# Altium PCB Shield_PCB.PcbDoc
Units mm, origin at the board's own origin, x right, y up, seen from the top; angles counter-clockwise.
Board outline 57.15 x 53.34 mm, 2 copper layers (Top Layer, Bottom Layer), stack 1.031 mm thick; 34 components, 67 nets, 124 pads, 10 vias.
Unrouted connection lines stored in the file: 1.
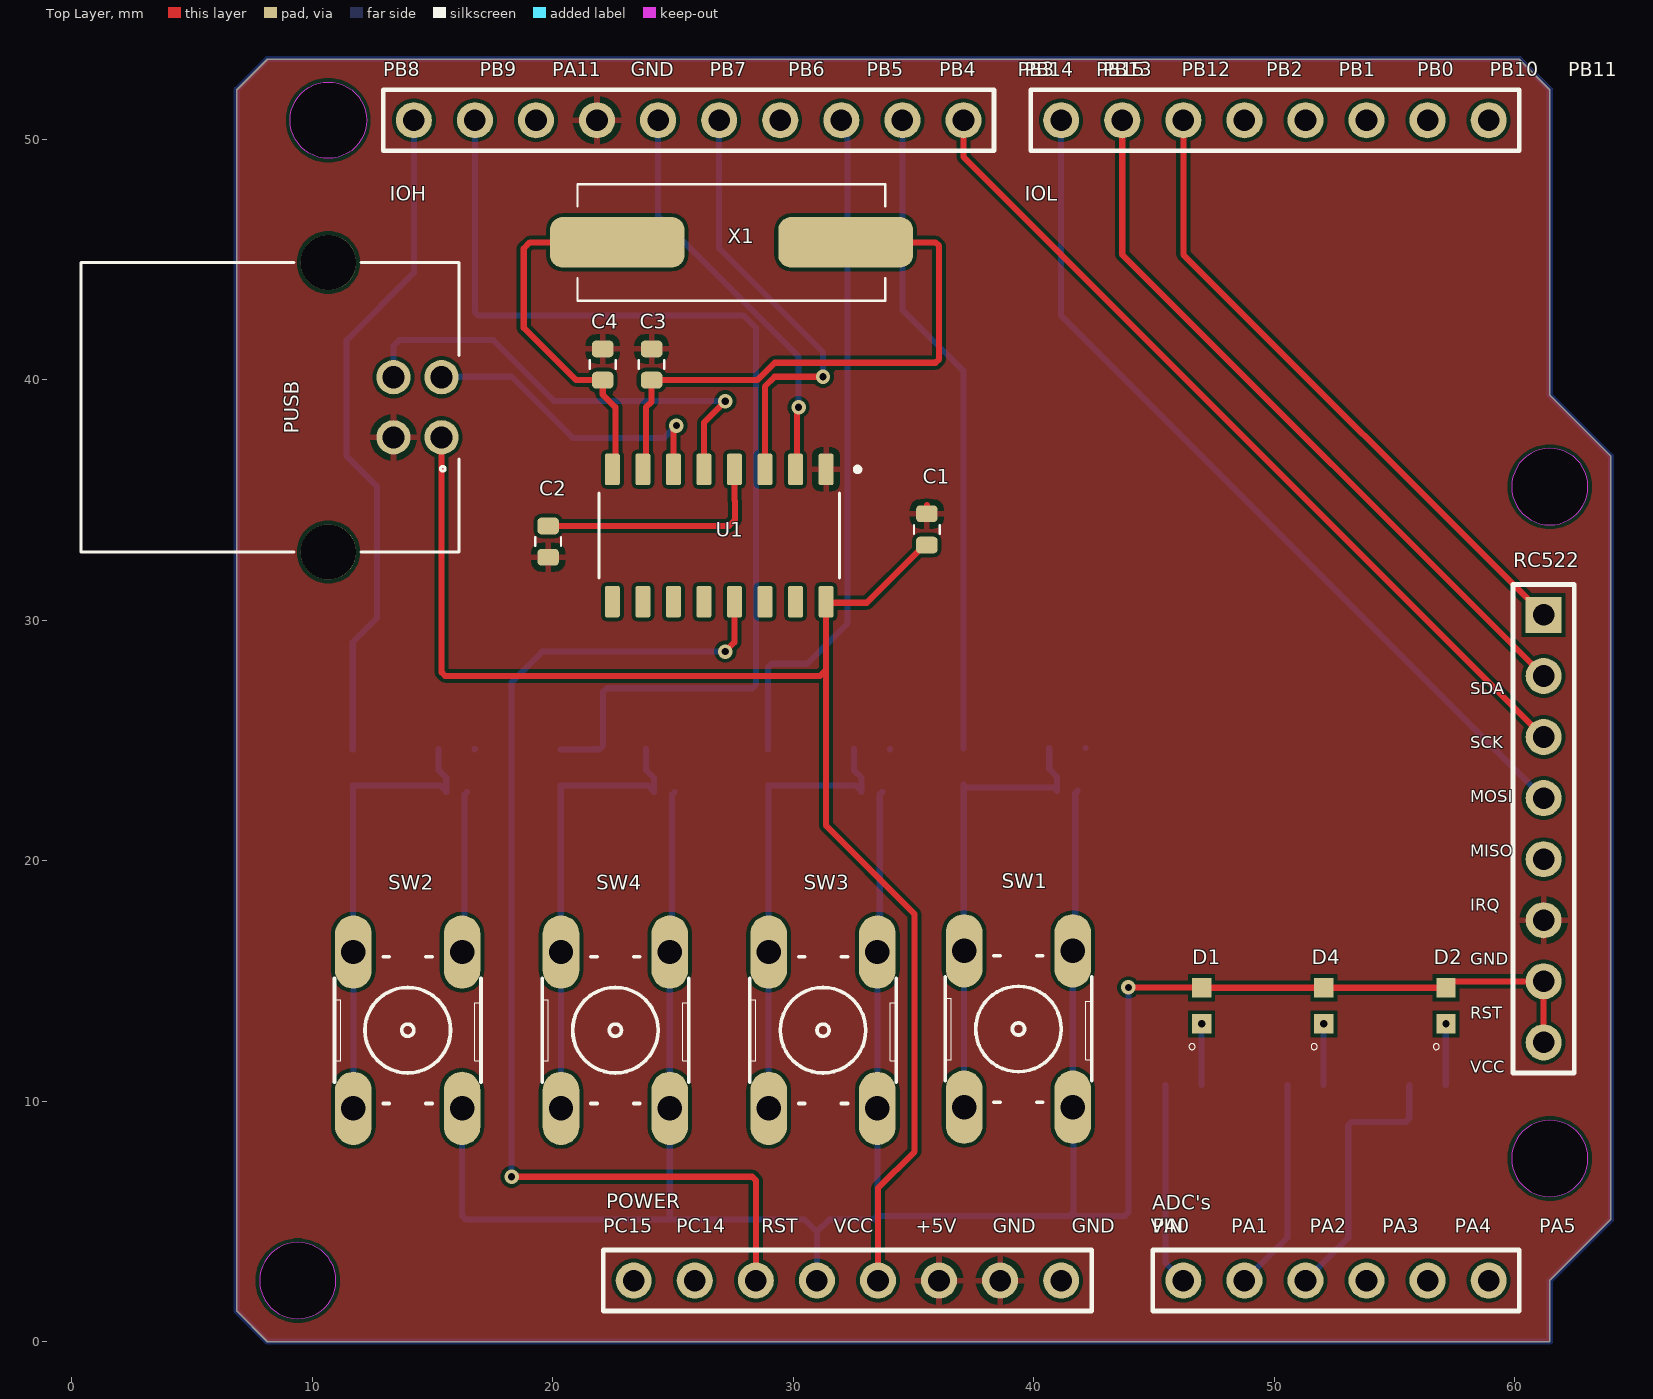
[diagram p0: Top Layer view]
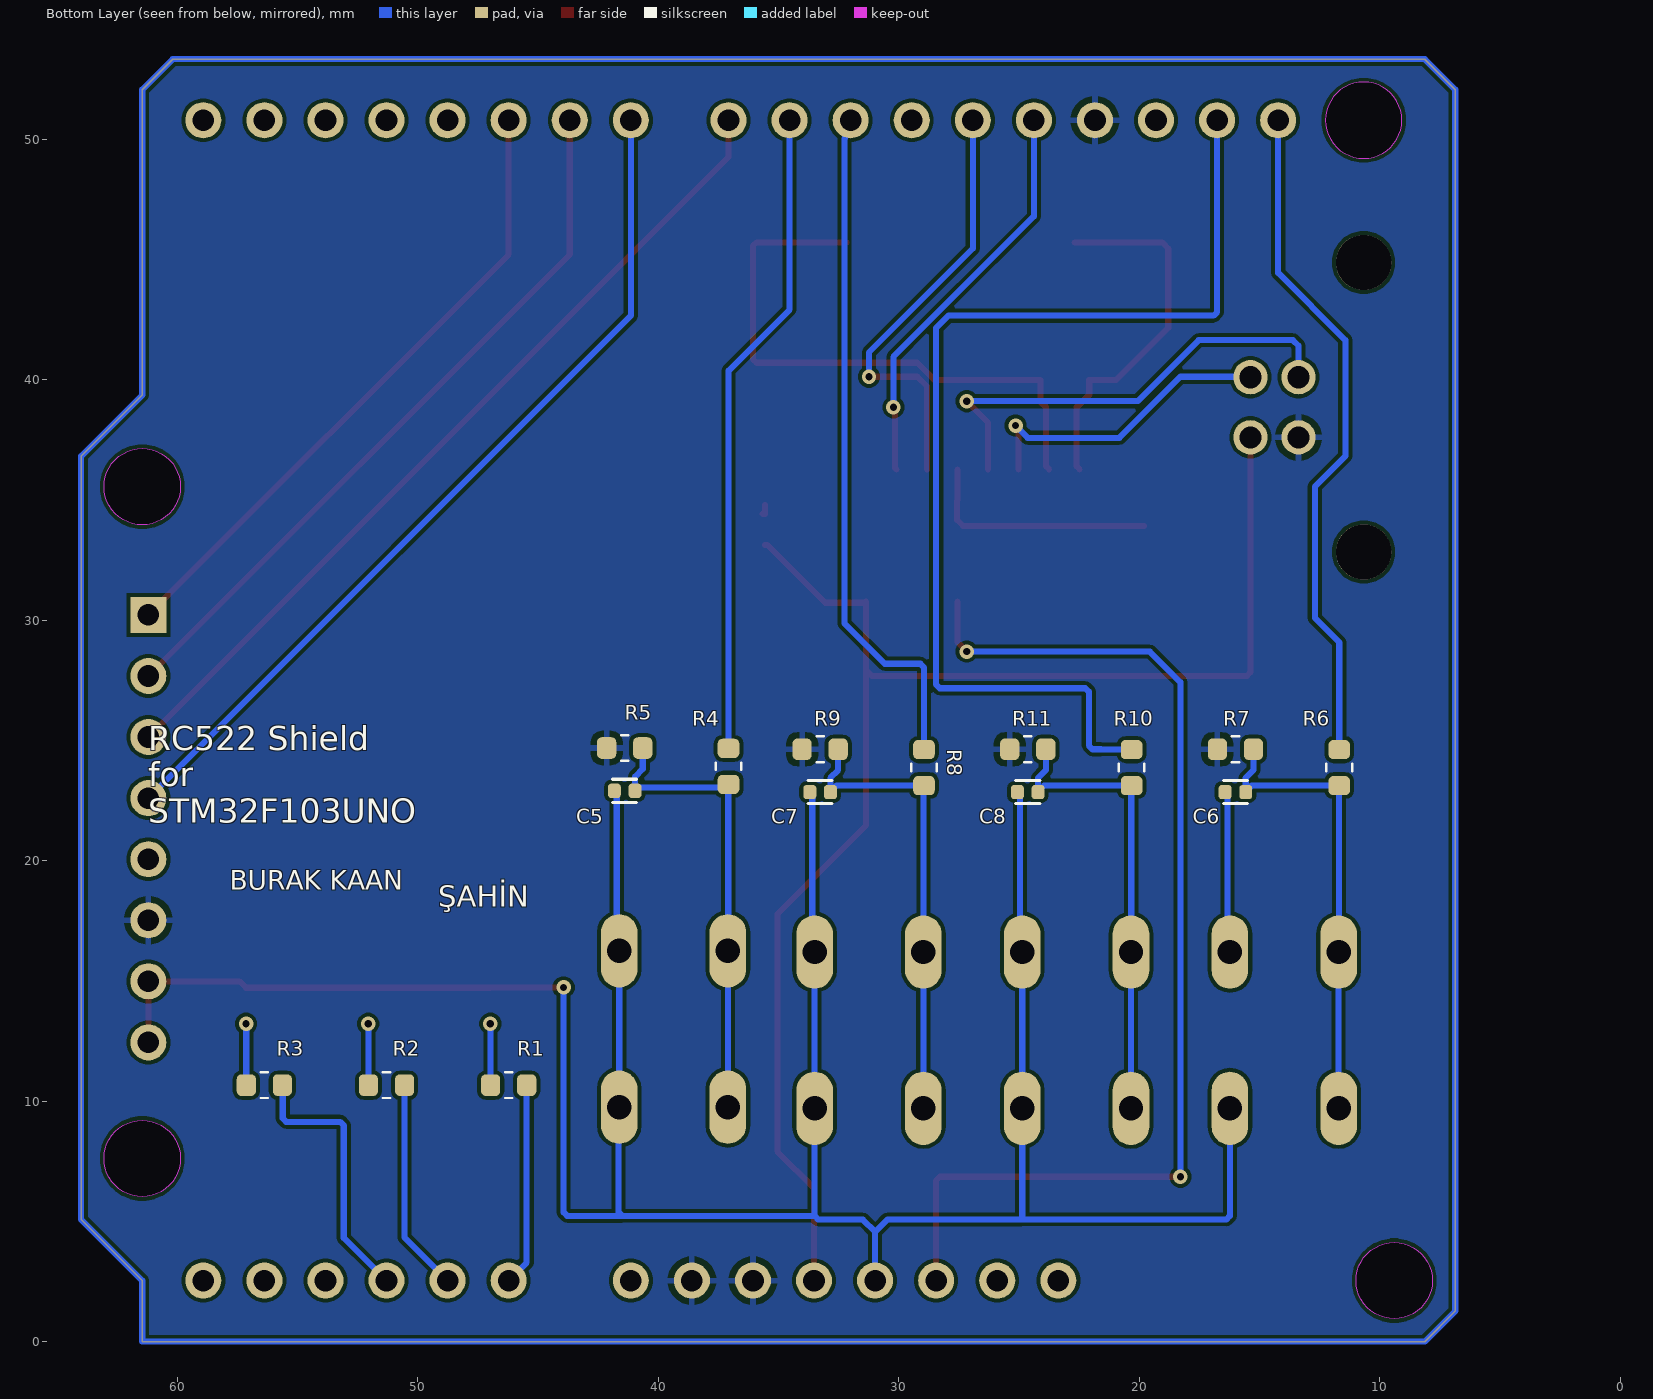
[diagram p1: Bottom Layer view, seen from below]
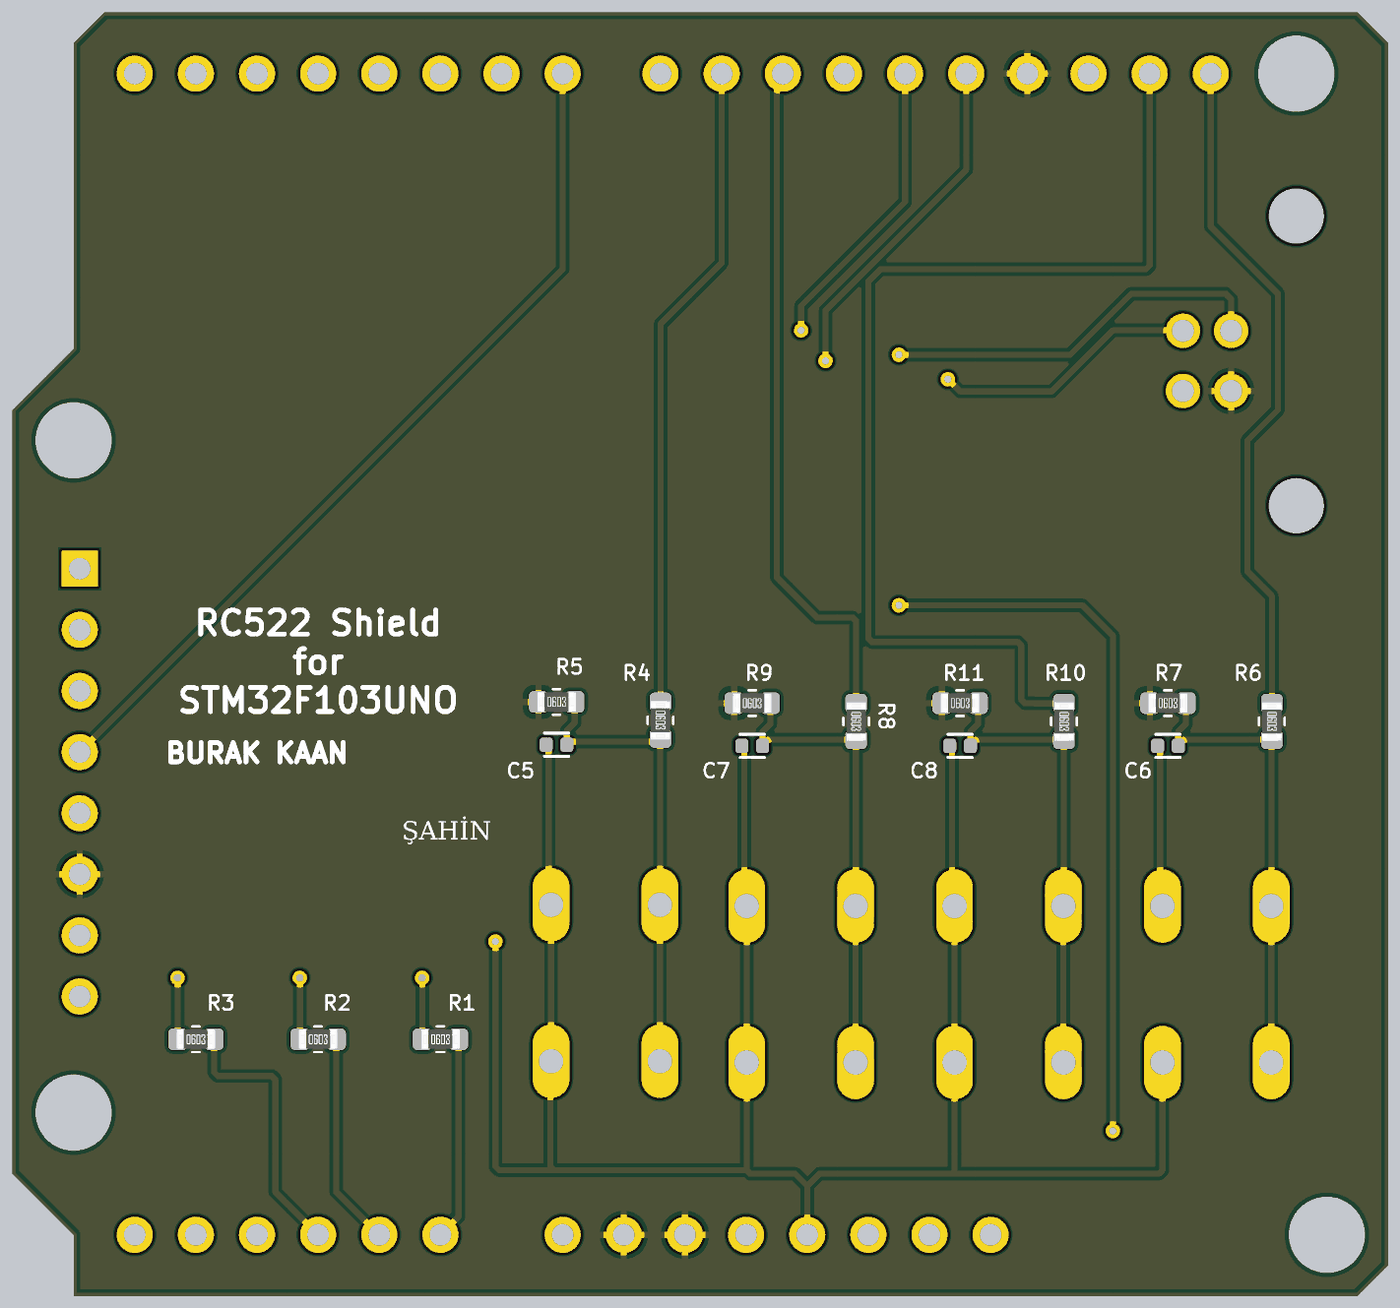
[diagram p2: 3D render of the assembled board from below, using the file's embedded part models]

## Layer stack, top to bottom
Top Solder: solder mask 0.0102, Solder Resist, Dk 3.5
Top Layer: signal copper 0.0356
Dielectric 1: dielectric 0.32, FR-4, Dk 4.8
Dielectric2: dielectric 0.32, FR-4, Dk 4.8
Dielectric3: dielectric 0.32, FR-4, Dk 4.8
Bottom Layer: signal copper 0.0356
Bottom Solder: solder mask 0.0102, Solder Resist, Dk 3.5

## Board outline
8.128,0 61.468,0 61.468,2.54 64.008,5.08 64.008,36.83 61.468,39.37 61.468,52.07 60.198,53.34 8.128,53.34 6.858,52.07 6.858,27.432 6.858,1.27
cut-out: 7.81,2.54 ccw(c9.398,2.54) 9.398,0.953 ccw(c9.398,2.54) 10.986,2.54 ccw(c9.398,2.54) 9.398,4.127 ccw(c9.398,2.54)
cut-out: 10.668,49.212 cw(c10.668,50.8) 9.08,50.8 cw(c10.668,50.8) 10.668,52.387 cw(c10.668,50.8) 12.255,50.8 cw(c10.668,50.8)
cut-out: 59.88,35.56 ccw(c61.468,35.56) 61.468,33.972 ccw(c61.468,35.56) 63.055,35.56 ccw(c61.468,35.56) 61.468,37.148 ccw(c61.468,35.56)
cut-out: 59.88,7.62 ccw(c61.468,7.62) 61.468,6.032 ccw(c61.468,7.62) 63.055,7.62 ccw(c61.468,7.62) 61.468,9.207 ccw(c61.468,7.62)

## Design rules (kind name [scope] priority, off if disabled: settings)
Clearance [All] p1: gap=0.152 ignorepadtopadclearanceinfootprint=FALSE except(0: Arc-Hole Track-Hole SMDPad-Hole THPad-Hole Via-Hole Fill-Hole Poly-Hole Region-Hole Text-Hole)
DiffPairsRouting [All] p1: maxlimit=0.254 minlimit=0.254 mostfreqgap=0.254 toplayer_minwidth=0.381 toplayer_maxwidth=0.381 toplayer_prefwidth=0.381 bottomlayer_minwidth=0.381 bottomlayer_maxwidth=0.381 bottomlayer_prefwidth=0.381 substack1={5EA368DA-DBC4-4814-93F0-2F85ABCD8383} toplayer_{5ea368da-dbc4-4814-93f0-2f85abcd8383}_minwidth=0.381 toplayer_{5ea368da-dbc4-4814-93f0-2f85abcd8383}_maxwidth=0.381 toplayer_{5ea368da-dbc4-4814-93f0-2f85abcd8383}_prefwidth=0.381 bottomlayer_{5ea368da-dbc4-4814-93f0-2f85abcd8383}_minwidth=0.381 bottomlayer_{5ea368da-dbc4-4814-93f0-2f85abcd8383}_maxwidth=0.381 bottomlayer_{5ea368da-dbc4-4814-93f0-2f85abcd8383}_prefwidth=0.381 maxuncoupledlength=12.7
PolygonConnect [All] p1: connectstyle=Relief reliefconductorwidth=0.254 reliefentries=4 polygonreliefangle="90 Angle" airgapwidth=0.254
RoutingVias [All] p1: holewidth=0.3 width=0.6 viastyle="Through Hole" minholewidth=0.3 minwidth=0.4 maxholewidth=1.2 maxwidth=1.2
SolderMaskExpansion [All] p1: expansion=0.102 istentingtop=FALSE
Width [All] p1: maxlimit=0.508 minlimit=0.152 preferedwidth=0.254 substack1={5EA368DA-DBC4-4814-93F0-2F85ABCD8383} toplayer_{5ea368da-dbc4-4814-93f0-2f85abcd8383}_minwidth=0.254 toplayer_{5ea368da-dbc4-4814-93f0-2f85abcd8383}_maxwidth=0.254 bottomlayer_{5ea368da-dbc4-4814-93f0-2f85abcd8383}_minwidth=0.254 bottomlayer_{5ea368da-dbc4-4814-93f0-2f85abcd8383}_maxwidth=0.254 minimp=50.000000 maximp=50.000000 favimp=50.000000
29 further rules are at their usual default settings.

## Components (designator, comment, footprint, x,y, rotation, side; value= is the part's Value field where it differs from the comment)
ADC's "Header 6" HDR1X6 46.228,2.54 r0 top locked (schematic designator P9)
C1 "CL10B222KB8NNNC" SAMSUNG_CAP_0603_090 35.56,33.782 r270 top locked
C2 "CL10B222KB8NNNC" SAMSUNG_CAP_0603_090 19.812,33.274 r90 top
C3 "CL10B222KB8NNNC" SAMSUNG_CAP_0603_090 24.112,40.64 r270 top locked
C4 "CL10B222KB8NNNC" SAMSUNG_CAP_0603_090 22.08,40.64 r270 top locked
C5 "CC0402MRY5V8BB104" CAPC1005X55N 41.402,22.911 r180 bottom locked
C6 "CC0402MRY5V8BB104" CAPC1005X55N 16.002,22.86 r180 bottom locked
C7 "CC0402MRY5V8BB104" CAPC1005X55N 33.274,22.86 r180 bottom locked
C8 "CC0402MRY5V8BB104" CAPC1005X55N 24.638,22.86 r180 bottom locked
D1 "LTST-C190GKT" LEDM1608X80 46.99,13.97 r90 top locked
D2 "LTST-C190GKT" LEDM1608X80 57.15,13.97 r90 top locked
D4 "LTST-C190GKT" LEDM1608X80 52.07,13.97 r90 top locked
IOH "Header 10" HDR1X10 37.084,50.8 r180 top locked (schematic designator P6)
IOL "Header 8" HDR1X8#1 58.928,50.8 r180 top locked (schematic designator P7)
POWER "Header 8" HDR1X8#1 41.148,2.54 r180 top locked (schematic designator P8)
PUSB "CONN_USB_B_292304-1" TE_292304-1 10.668,38.862 r270 top locked
R1 "0603SAJ0331T5E" ROYALOHM_RES_0603 46.228,10.668 r180 bottom locked
R2 "0603SAJ0331T5E" ROYALOHM_RES_0603 51.308,10.668 r180 bottom locked
R3 "0603SAJ0331T5E" ROYALOHM_RES_0603 56.388,10.668 r180 bottom locked
R4 "0603SAJ0331T5E" ROYALOHM_RES_0603 37.084,23.927 r270 bottom locked
R5 "0603SAJ0331T5E" ROYALOHM_RES_0603 41.402,24.689 r180 bottom locked
R6 "0603SAJ0331T5E" ROYALOHM_RES_0603 11.684,23.876 r270 bottom locked
R7 "0603SAJ0331T5E" ROYALOHM_RES_0603 16.002,24.638 r180 bottom locked
R8 "0603SAJ0331T5E" ROYALOHM_RES_0603 28.956,23.876 r270 bottom locked
R9 "0603SAJ0331T5E" ROYALOHM_RES_0603 33.274,24.638 r180 bottom locked
R10 "0603SAJ0331T5E" ROYALOHM_RES_0603 20.32,23.876 r270 bottom locked
R11 "0603SAJ0331T5E" ROYALOHM_RES_0603 24.638,24.638 r180 bottom locked
RC522 "RFID Header" HDR1X8#2 61.214,30.226 r270 top locked (schematic designator P3)
SW1 "SKHHANA010" SW_SKHHANA010 39.37,13.005 r90 top locked
SW2 "SKHHANA010" SW_SKHHANA010 13.97,12.954 r90 top locked
SW3 "SKHHANA010" SW_SKHHANA010 31.242,12.954 r90 top locked
SW4 "SKHHANA010" SW_SKHHANA010 22.606,12.954 r90 top locked
U1 "CH340G" SOIC127P600X180-16N 26.924,33.528 r270 top locked
X1 "ABLS-25.000MHZ-B4-T" ABRACON_HC-49/US 27.432,45.72 r180 top locked

## Footprints (in the part's own frame and the unit in brackets; to place one, negate y for a bottom-side part, rotate by r counter-clockwise, add the part's x,y. Pads: shape width x height; smd on the part's side, far side on the other; paste and mask are expansions set on the pad)
ABRACON_HC-49/US [mm]
  rrect50% 5.6x2.1 smd: 1(-4.75,0) 2(4.75,0)
  silkscreen extent -6.4,-2.42 6.4,2.42, body extent -6.4,-2.41 6.4,2.42, height 4.3
CAPC1005X55N [mm]
  rrect53% 0.54x0.6 smd: 1(-0.43,0) 2(0.43,0)
  silkscreen extent -0.5,-0.48 0.5,0.48
HDR1X6 [mm] "Connector; Header; 6 Position"
  round 1.5 hole 0.9: 1(0,0) 2(2.54,0) 3(5.08,0) 4(7.62,0) 5(10.16,0) 6(12.7,0)
  silkscreen extent -1.27,-1.27 13.97,1.27
HDR1X8#1 [mm] "Connector; Header; 8 Position"
  round 1.5 hole 0.9: 1(0,0) 2(2.54,0) 3(5.08,0) 4(7.62,0) 5(10.16,0) 6(12.7,0) 7(15.24,0) 8(17.78,0)
  silkscreen extent -1.27,-1.27 19.05,1.27
HDR1X8#2 [mm] "Connector; Header; 8 Position"
  rect 1.5x1.5 hole 0.9: 1(0,0)
  round 1.5 hole 0.9: 2(2.54,0) 3(5.08,0) 4(7.62,0) 5(10.16,0) 6(12.7,0) 7(15.24,0) 8(17.78,0)
  silkscreen extent -1.27,-1.27 19.05,1.27
HDR1X10 [mm] "Connector; Header; 10 Position"
  round 1.5 hole 0.9: 1(0,0) 2(2.54,0) 3(5.08,0) 4(7.62,0) 5(10.16,0) 6(12.7,0) 7(15.24,0) 8(17.78,0) 9(20.32,0) 10(22.86,0)
  silkscreen extent -1.27,-1.27 24.13,1.27
LEDM1608X80 [mm]
  rect 0.8x0.8 smd: A(0.75,0) C(-0.75,0)
  silkscreen extent -1.83,0.27 -1.57,0.53
ROYALOHM_RES_0603 [mm]
  rrect50% 0.8x0.9 smd paste+0 mask+0.04: 1(-0.75,0) 2(0.75,0)
  silkscreen extent -0.15,-0.53 0.15,0.53, body extent -0.8,-0.4 0.8,0.4, height 0.45
SAMSUNG_CAP_0603_090 [mm]
  rrect50% 0.7x0.9 smd paste+0 mask+0.04: 1(-0.65,0) 2(0.65,0)
  silkscreen extent -0.18,-0.53 0.18,0.53, body extent -0.8,-0.41 0.8,0.41, height 0.81
SOIC127P600X180-16N [mm]
  rrect25% 1.31x0.62 smd: 1(-2.75,4.445) 2(-2.75,3.175) 3(-2.75,1.905) 4(-2.75,0.635) 5(-2.75,-0.635) 6(-2.75,-1.905) 7(-2.75,-3.175) 8(-2.75,-4.445) 9(2.75,-4.445) 10(2.75,-3.175) 11(2.75,-1.905) 12(2.75,-0.635) 13(2.75,0.635) 14(2.75,1.905) 15(2.75,3.175) 16(2.75,4.445)
  silkscreen extent -2.85,-5 1.78,5.85, body extent -3,-5 3,5, height 1.8
SW_SKHHANA010 [mil]
  oval 120x60 hole 40: 1(-128,89) 2(128,89) 3(-128,-89) 4(128,-89)
  silkscreen extent -120,-120 120,120
TE_292304-1 [mm]
  round 1.428 hole 0.92: 1(1.25,4.71) 2(-1.25,4.71) 3(-1.25,2.71) 4(1.25,2.71)
  round 2.3 hole 2.3 unplated: ""(-6.02,0) ""(6.02,0)
  silkscreen extent -6.01,-10.28 6.01,5.43

## Part data
ADC's: "Header, 6-Pin", LatestRevisionDate=17-Jul-2002, LatestRevisionNote="Re-released for DXP Platform.", Publisher="Altium Limited"
C1 C2: "CAP CER 2200PF 50V X7R 0603", Capacitance="100 nF", Manufacturer="Samsung Electro-Mechanics", Operating Temperature="-55°C ~ 125°C", Package="Tape & Reel (TR)", Package / Case="0603 (1608 Metric)", Ratings=-, Supplier Part Number 1=1276-1110-1-ND, Temperature Coefficient=X7R, Tolerance=±10%, Voltage - Rated="50 V", Applications="General Purpose", Digikey Link=https://www.digikey.com/en/products/detail/samsung-electro-mechanics/CL10B222KB8NNNC/3886768?s=N4IgTCBcDaIMIBkCMAGAQmTBpNAOAcoXCALoC%2BQA, Farnell Link=https://tr.farnell.com/samsung-electro-mechanics/cl10b222kb8nnnc/cap-2200pf-50v-mlcc-0603/dp/3013424?st=cl10b222kb8nnnc, Features=-, Height - Seated (Max)=-, Lead Spacing=-, Lead Style=-, Mounting Type="Surface Mount, MLCC", Mouser Link=https://www.mouser.com.tr/ProductDetail/Samsung-Electro-Mechanics/CL10B222KB8NNNC?qs=%2Fha2pyFaduiYAieMNAGY%2Fbybcsm2neKaXkwr9Z%2FZUBvjhuhemCiTrg%3D%3D, Ozdisan Link=https://ozdisan.com/pasif-komponentler/kondansatorler/smt-smd-ve-mlcc-kondansatorler/CL10B222KB8NNNC, Part Number=CL10B222KB8NNNC, Series=CL, Size / Dimension="0.063\" L x 0.031\" W (1.60mm x 0.80mm)", Supplier 1=Digi-Key, Supplier 2=Farnell, Supplier 3=Mouser, Supplier 4="Arrow Electronics", Supplier Part Number 2=3013424, Supplier Part Number 3=187-CL10B222KB8NNNC, Supplier Part Number 4=CL10B222KB8NNNC, Thickness (Max)="0.035\" (0.90mm)"
C3 C4: "CAP CER 2200PF 50V X7R 0603", Capacitance="22 pF", Manufacturer="Samsung Electro-Mechanics", Operating Temperature="-55°C ~ 125°C", Package="Tape & Reel (TR)", Package / Case="0603 (1608 Metric)", Ratings=-, Supplier Part Number 1=1276-1110-1-ND, Temperature Coefficient=X7R, Tolerance=±10%, Voltage - Rated="50 V", Applications="General Purpose", Digikey Link=https://www.digikey.com/en/products/detail/samsung-electro-mechanics/CL10B222KB8NNNC/3886768?s=N4IgTCBcDaIMIBkCMAGAQmTBpNAOAcoXCALoC%2BQA, Farnell Link=https://tr.farnell.com/samsung-electro-mechanics/cl10b222kb8nnnc/cap-2200pf-50v-mlcc-0603/dp/3013424?st=cl10b222kb8nnnc, Features=-, Height - Seated (Max)=-, Lead Spacing=-, Lead Style=-, Mounting Type="Surface Mount, MLCC", Mouser Link=https://www.mouser.com.tr/ProductDetail/Samsung-Electro-Mechanics/CL10B222KB8NNNC?qs=%2Fha2pyFaduiYAieMNAGY%2Fbybcsm2neKaXkwr9Z%2FZUBvjhuhemCiTrg%3D%3D, Ozdisan Link=https://ozdisan.com/pasif-komponentler/kondansatorler/smt-smd-ve-mlcc-kondansatorler/CL10B222KB8NNNC, Part Number=CL10B222KB8NNNC, Series=CL, Size / Dimension="0.063\" L x 0.031\" W (1.60mm x 0.80mm)", Supplier 1=Digi-Key, Supplier 2=Farnell, Supplier 3=Mouser, Supplier 4="Arrow Electronics", Supplier Part Number 2=3013424, Supplier Part Number 3=187-CL10B222KB8NNNC, Supplier Part Number 4=CL10B222KB8NNNC, Thickness (Max)="0.035\" (0.90mm)"
C5 C6 C7 C8: "CAP CER 0.1UF 25V Y5V 0402", Package=None, Availability=Unavailable, MP=CC0402MRY5V8BB104, Price=None
D1 D2 D4: "Green 569nm LED Indication - Discrete 2.1V 0603 (1608 Metric)", Package="0603 Lite-On", Digi-Key_Part_Number=160-1183-1-ND, DigiKey-Purchase-URL=https://snapeda.com/shop?store=DigiKey&id=46935, MF="Lite-On Inc.", MP=LTST-C190GKT, SnapEDA_Link=https://www.snapeda.com/parts/LTST-C190GKT/Lite-On%20Inc./view-part/46935/?ref=snap
IOH: "Header, 10-Pin", LatestRevisionDate=17-Jul-2002, LatestRevisionNote="Re-released for DXP Platform.", Publisher="Altium Limited"
IOL POWER: "Header, 8-Pin", LatestRevisionDate=17-Jul-2002, LatestRevisionNote="Re-released for DXP Platform.", Publisher="Altium Limited"
PUSB: library part 292304-1, "USB-B _USB TYPE-B_ USB 2.0 Receptacle Connector 4 Position Through Hole, Right Angle", Package=None, Availability=Unavailable, Centerline_Pitch="2.5 mm[.098 in]", EU_RoHS_Compliance=Compliant, MF="TE Connectivity", MP=292304-1, Number_of_Positions=4, Price=None, Product_Type=Connector, SnapEDA_Link=https://www.snapeda.com/parts/292304-1/TE%20Connectivity%20AMP%20Connectors/view-part/585812/?ref=snap, TE_purchase_URL=https://www.te.com/usa-en/product-292304-1.html?te_bu=Cor&te_type=disp&te_campaign=seda_glo_cor-seda-global-disp-prtnr-fy19-seda-model-bom-cta_sma-317_1&elqCampaignId=32493
R1 R2 R3: "RES SMD 510R OHM 5% 1/10W 0603", Manufacturer=Royalohm, Operating Temperature="-55°C ~ 155°C", Package="Tape & Reel (TR)", Package / Case="0603 (1608 Metric)", Power (Watts)="0.1 W, 1/10 W", Ratings=-, Resistance=510, Supplier Device Package=0603, Temperature Coefficient="±100 ppm/°C", Tolerance=±5%, Composition="Thick Film", Digikey Link=-, Failure Rate=-, Farnell Link=-, Features="General Purpose", Height - Seated (Max)="0.022\" (0.55mm)", Mouser Link=-, Number of Terminations=2, Ozdisan Link=https://ozdisan.com/pasif-komponentler/direncler/smt-smd-ve-cip-direncler/0603SAJ0331T5E, Part Number=0603SAJ0331T5E, Series=-, Size / Dimension="0.063\" L x 0.031\" W (1.60mm x 0.80mm)"
R4 R6 R8 R10: "RES SMD 510R OHM 5% 1/10W 0603", Manufacturer=Royalohm, Operating Temperature="-55°C ~ 155°C", Package="Tape & Reel (TR)", Package / Case="0603 (1608 Metric)", Power (Watts)="0.1 W, 1/10 W", Ratings=-, Resistance=330, Supplier Device Package=0603, Temperature Coefficient="±100 ppm/°C", Tolerance=±5%, Composition="Thick Film", Digikey Link=-, Failure Rate=-, Farnell Link=-, Features="General Purpose", Height - Seated (Max)="0.022\" (0.55mm)", Mouser Link=-, Number of Terminations=2, Ozdisan Link=https://ozdisan.com/pasif-komponentler/direncler/smt-smd-ve-cip-direncler/0603SAJ0331T5E, Part Number=0603SAJ0331T5E, Series=-, Size / Dimension="0.063\" L x 0.031\" W (1.60mm x 0.80mm)"
R5 R7 R9 R11: "RES SMD 510R OHM 5% 1/10W 0603", Manufacturer=Royalohm, Operating Temperature="-55°C ~ 155°C", Package="Tape & Reel (TR)", Package / Case="0603 (1608 Metric)", Power (Watts)="0.1 W, 1/10 W", Ratings=-, Resistance=220, Supplier Device Package=0603, Temperature Coefficient="±100 ppm/°C", Tolerance=±5%, Composition="Thick Film", Digikey Link=-, Failure Rate=-, Farnell Link=-, Features="General Purpose", Height - Seated (Max)="0.022\" (0.55mm)", Mouser Link=-, Number of Terminations=2, Ozdisan Link=https://ozdisan.com/pasif-komponentler/direncler/smt-smd-ve-cip-direncler/0603SAJ0331T5E, Part Number=0603SAJ0331T5E, Series=-, Size / Dimension="0.063\" L x 0.031\" W (1.60mm x 0.80mm)"
RC522: library part "Header 8", "Header, 8-Pin", LatestRevisionDate=17-Jul-2002, LatestRevisionNote="Re-released for DXP Platform.", Publisher="Altium Limited"
SW1 SW2 SW3 SW4: "Switch Tactile N.O. SPST Round Button PC Pins 0.05A 12VDC 0.98N Thru-Hole Bulk", Package=None, Availability=Unavailable, MF=ALPS, MP=SKHHANA010, Price=None, SnapEDA_Link=https://www.snapeda.com/parts/SKHHANA010/ALPS/view-part/248805/?ref=snap
U1: "USB Interface Integrated Circuit", Package=None, Availability="Not in stock", Check_prices=https://www.snapeda.com/parts/Ch340G/WCH/view-part/?ref=eda, MF=WCH, MP=Ch340G, Price=None, SnapEDA_Link=https://www.snapeda.com/parts/Ch340G/WCH/view-part/?ref=snap
X1: library part ABLS-8.000MHZ-B4-T, "CRYSTAL 8.0000MHZ 18PF SMD", ESR (Equivalent Series Resistance)="80 Ohms", Frequency="25 MHz", Frequency Stability="±50 ppm", Frequency Tolerance="±30 ppm", Load Capacitance="18 pF", Manufacturer="Abracon LLC", Operating Mode=Fundamental, Operating Temperature="-20°C ~ 70°C", Package="Tape & Reel (TR)", Package / Case=HC-49/US, Ratings=-, Supplier Part Number 1=535-10212-1-ND, Digikey Link=https://www.digikey.com/en/products/detail/abracon-llc/ABLS-8-000MHZ-B4-T/2184155?s=N4IgTCBcDaIIICEAyBlAtADgHQAY8FkAJALTQQBY0AVEAXQF8g, Farnell Link=https://tr.farnell.com/abracon/abls-8-000mhz-b4-t/crystal-8mhz-18pf-hc-49us/dp/2467757?st=abls-8.000mhz-b4-t, Height - Seated (Max)="0.165\" (4.20mm)", Mounting Type="Surface Mount", Mouser Link=https://www.mouser.com.tr/ProductDetail/ABRACON/ABLS-8000MHZ-B4-T?qs=%2Fha2pyFadug9a307lIAi6Clp1F%252BGEpwfWRmDaTuihuzHm6%252BPPduuWg%3D%3D, Ozdisan Link=https://ozdisan.com/pasif-komponentler/kristaller-osilatorler-ve-rezanatorler/kristaller/ABLS-8-000MHZ-B4-T, Part Number=ABLS-8.000MHZ-B4-T, Series=ABLS, Size / Dimension="0.449\" L x 0.185\" W (11.40mm x 4.70mm)", Supplier 1=Digi-Key, Supplier 2=Farnell, Supplier 3=Mouser, Supplier 4="Arrow Electronics", Supplier Part Number 2=2467757, Supplier Part Number 3=815-ABLS-8.0M-T, Supplier Part Number 4=ABLS-8.000MHZ-B4-T, Type="MHz Crystal"

## Via types
v1: diameter 0.6, hole 0.3, Top Layer to Bottom Layer, 10 vias

## Nets (pads, with @x,y where several pads share a name; then routed paths per layer and width w, separated by ;. In a path a pad name is that pad's centre, name@x,y a point inside that pad or via, vN(x,y) a via of type N, cw(c..) or ccw(c..) an arc to the next point about the centre after c; other vN are vias at no path point)
+3V3: 
+5V: C1.2 POWER.4 PUSB.1 U1.16 | length 61.5
  Top Layer w0.254: PUSB.1 15.378,27.835 15.527,27.686 31.115,27.686 31.369,27.94 ; POWER.4 33.528,6.379 35.052,7.903 35.052,17.78 31.369,21.463 31.369,27.94 ; C1.2 35.46,33.132 33.062,30.734 31.413,30.734 U1.16 31.369,27.94
AD0/PA0: 
AD1/PA1: 
AD2/PA2: 
AD3/PA3: 
AD4/SDA/PA4: 
AD4/SDA/PB9: 
AD5/SCL/PA5: 
AD5/SCL/PB8: 
AREF/PA11: 
GND: C1.1 C2.1 C3.1 C4.1 IOH.7 POWER.2 POWER.3 PUSB.4 R5.1 R7.1 R9.1 R11.1 RC522.6 U1.1 | length 0.5
  Top Layer w0.254: 35.56,34.798 C1.1 C1.1@35.66,34.432
  Bottom Layer w0.254: R7.1 R7.1@16.758,24.644 ; R9.1 R9.1@34.03,24.644 ; R5.1 R5.1@42.158,24.695
IO2/PB0: 
IO3/PB1: 
IO4/PB2: 
IO5/PB12: 
IO6/PB13: 
IO7/PB14: 
IO8/PB15: 
IO9/PB3: 
MISO/IO12/PB6: 
MOSI/IO11/PB5: 
NetC2_2: C2.2 U1.4 | length 10
  Top Layer w0.254: C2.2 27.32,33.924 27.581,34.185 27.581,34.956 27.559,34.978 U1.4
NetC3_2: C3.2 U1.7 X1.1 | length 24.8
  Top Layer w0.254: U1.7 23.876,36.405 23.876,38.862 24.112,39.098 C3.2 28.515,39.99 29.236,40.711 35.919,40.711 36.068,40.86 36.068,45.571 35.919,45.72 X1.1
NetC4_2: C4.2 U1.8 X1.2 | length 15.5
  Top Layer w0.254: U1.8 22.606,36.405 22.606,38.862 22.08,39.388 C4.2 20.97,39.99 18.796,42.164 18.796,45.466 19.05,45.72 X1.2
NetC5_2: C5.2 R4.2 R5.2 SW1.1 SW1.2 | length 19.3
  Bottom Layer w0.254: R4.2 R4.2@37.097,23.164 ; SW1.1 SW1.2 37.097,16.269 R4.2@37.097,23.164 ; R5.2 40.652,23.82 40.972,23.5 C5.2 40.839,23.044 37.217,23.044 R4.2@37.097,23.164
NetC6_2: C6.2 R6.2 R7.2 SW2.1 SW2.2 | length 19.3
  Bottom Layer w0.254: SW2.1 SW2.2 11.697,16.218 11.697,23.113 R6.2 15.327,23.126 C6.2@15.572,22.881 ; R7.2 15.252,23.77 15.572,23.45 C6.2@15.572,22.881 ; C6.2 C6.2@15.572,22.881
NetC7_2: C7.2 R8.2 R9.2 SW3.1 SW3.2 | length 19.3
  Bottom Layer w0.254: SW3.1 SW3.2 28.969,16.218 28.969,23.113 R8.2 32.599,23.126 C7.2@32.844,22.881 ; R9.2 32.524,23.77 32.844,23.45 C7.2@32.844,22.881 ; C7.2 C7.2@32.844,22.881
NetC8_2: C8.2 R10.2 R11.2 SW4.1 SW4.2 | length 19.3
  Bottom Layer w0.254: SW4.1 SW4.2 20.333,16.218 20.333,23.113 R10.2 23.963,23.126 C8.2@24.208,22.881 ; R11.2 23.888,23.77 24.208,23.45 C8.2@24.208,22.881 ; C8.2 C8.2@24.208,22.881
NetD1_C: D1.C R1.1 | length 2.6
  Bottom Layer w0.254: R1.1 46.984,10.674 46.984,13.214 v1(46.99,13.22)
NetD2_C: D2.C R3.1 | length 2.6
  Bottom Layer w0.254: R3.1 57.144,10.674 57.144,13.214 v1(57.15,13.22)
NetD4_C: D4.C R2.1 | length 2.6
  Bottom Layer w0.254: R2.1 52.064,10.674 52.064,13.214 v1(52.07,13.22)
NRST/RESET: POWER.6 U1.13 | length 46.6
  Top Layer w0.254: v1(18.288,6.858) 28.299,6.858 28.448,6.709 POWER.6 ; v1(27.178,28.702) 27.559,29.083 U1.13
  Bottom Layer w0.254: v1(18.288,6.858) 18.288,27.432 19.558,28.702 v1(27.178,28.702)
PA0: ADC's.1 R1.2 | length 8.4
  Bottom Layer w0.254: R1.2 45.478,3.29 ADC's.1
PA1: ADC's.2 R2.2 | length 8.9
  Bottom Layer w0.254: ADC's.2 50.558,4.33 R2.2
PA2: ADC's.3 R3.2 | length 11.2
  Bottom Layer w0.254: ADC's.3 53.086,4.318 53.086,8.995 53.235,9.144 55.477,9.144 55.626,9.293 55.626,10.606 55.638,10.618 R3.2
PA3: ADC's.4
PA4: ADC's.5
PA5: ADC's.6
PA11: IOH.8
PB0: IOL.3
PB1: IOL.4
PB2: IOL.5
PB3: IOH.2 R4.1 | length 27.2
  Bottom Layer w0.254: IOH.2 34.544,42.926 37.084,40.386 R4.1
PB4: IOH.3 R8.1 | length 28.5
  Bottom Layer w0.254: R8.1 28.956,28.045 29.105,28.194 30.585,28.194 32.258,29.867 32.258,50.028 32.242,50.044 32.242,50.562 IOH.3
PB5: IOH.4
PB6: IOH.5 U1.3 | length 18.5
  Top Layer w0.254: U1.3 28.829,39.729 29.232,40.132 v1(31.242,40.132)
  Bottom Layer w0.254: IOH.5 26.924,45.466 31.242,41.148 v1(31.242,40.132)
PB7: IOH.6 U1.2 | length 17
  Top Layer w0.254: U1.2 30.162,36.341 30.162,38.798 v1(30.226,38.862)
  Bottom Layer w0.254: IOH.6 24.384,46.803 30.226,40.961 v1(30.226,38.862)
PB8: IOH.10 R6.1 | length 28.3
  Bottom Layer w0.254: R6.1 11.684,29.084 12.7,30.1 12.7,35.56 11.43,36.83 11.43,41.656 14.224,44.45 IOH.10
PB9: IOH.9 R10.1 | length 45.3
  Bottom Layer w0.254: IOH.9 16.764,42.821 16.913,42.672 27.94,42.672 28.448,42.164 28.448,27.327 28.299,27.178 22.247,27.178 22.098,27.029 22.098,24.787 21.949,24.638 21.59,24.638 21.578,24.626 R10.1
PB10: IOL.2
PB11: IOL.1
PB12: IOL.6 RC522.1 | length 26.8
  Top Layer w0.254: IOL.6 46.228,45.212 RC522.1
PB13: IOL.7 RC522.2 | length 30.4
  Top Layer w0.254: IOL.7 43.688,45.212 RC522.2
PB14: IOL.8 RC522.4 | length 36.5
  Bottom Layer w0.254: IOL.8 41.148,42.672 RC522.4
PB15: IOH.1 RC522.3 | length 35.6
  Top Layer w0.254: IOH.1 37.084,49.276 RC522.3
PC14: POWER.7
PC15: POWER.8
RESET: 
RX/IO0/PB11: 
SCK/IO13/PB7: 
SS/IO10/PB4: 
TX/IO1/PB10: 
UD+: PUSB.2 U1.6 | length 12.9
  Top Layer w0.254: U1.6 25.019,37.879 25.146,38.006 v1(25.146,38.1)
  Bottom Layer w0.254: PUSB.2 15.398,40.132 18.288,40.132 20.828,37.592 24.638,37.592 v1(25.146,38.1)
UD-: PUSB.3 U1.5 | length 19.5
  Top Layer w0.254: U1.5 26.289,38.227 v1(27.178,39.116)
  Bottom Layer w0.254: PUSB.3 13.378,41.423 13.611,41.656 17.526,41.656 20.066,39.116 v1(27.178,39.116)
VCC: C5.1 C6.1 C7.1 C8.1 D1.A D2.A D4.A POWER.5 RC522.7 RC522.8 SW1.3 SW1.4 SW2.3 SW2.4 SW3.3 SW3.4 SW4.3 SW4.4 | length 124.3
  Top Layer w0.254: v1(43.942,14.732) 46.978,14.732 D1.A D4.A D2.A 57.416,14.986 RC522.7 RC522.8
  Bottom Layer w0.254: SW2.3 16.231,5.229 16.379,5.08 24.892,5.08 ; SW2.4 16.331,16.306 16.331,22.759 C6.1 ; C8.1 24.967,22.759 24.967,16.306 SW4.4 SW4.3 24.867,5.105 24.892,5.08 ; POWER.5 30.988,4.572 ; C7.1 33.603,22.759 33.603,16.306 SW3.4 SW3.3 33.503,5.229 ; C5.1 41.731,22.81 41.731,16.357 SW1.4 SW1.3 41.656,9.728 41.656,5.378 41.507,5.229 ; v1(43.942,14.732) 43.942,5.378 43.793,5.229 41.507,5.229 ; 24.892,5.08 30.48,5.08 30.988,4.572 ; 30.988,4.572 31.496,5.08 33.354,5.08 33.503,5.229 ; 33.503,5.229 41.507,5.229
VIN: POWER.1
pads on no net: PUSB. RC522.5 U1.9 U1.10 U1.11 U1.12 U1.14 U1.15
copper on no net: | length 215.8
  Bottom Layer w0.254: 6.858,1.27 6.858,52.07 8.128,53.34 60.198,53.34 61.468,52.07 61.468,39.37 64.008,36.83 64.008,5.08 61.468,2.54 61.468,0 8.128,0 6.858,1.27

## Polygon pours and split planes (outlines as drawn)
GND on Bottom Layer "GND_L02_P000" (solid, pour order 0): 60.198,53.34 61.468,52.07 61.468,39.37 64.008,36.83 64.008,5.08 61.468,2.54 61.468,0 8.128,0 6.858,1.27 6.858,52.07 8.128,53.34
GND on Top Layer "GND_L01_P001" (solid, pour order 1): 60.198,53.34 61.468,52.07 61.468,39.37 64.008,36.83 64.008,5.08 61.468,2.54 61.468,0 8.128,0 6.858,1.27 6.858,52.07 8.128,53.34

## Silkscreen, mask and mechanical layers (free items; w line width, h text height)
Top Overlay:
  text "PB8          PB9      PA11     GND      PB7       PB6       PB5      PB4       PB3       PB15" at 12.954,52.424 h1
  text "PB14     PB13     PB12      PB2      PB1       PB0      PB10     PB11" at 39.624,52.431 h1
  text "SDA /  /  / SCK /  /  / MOSI /  /  / MISO /  /  / IRQ /  /  / GND /  /  / RST /  /  / VCC" at 58.166,11.176 h0.5
  text "PC15    PC14      RST      VCC       +5V      GND      GND      VIN" at 22.098,4.325 h1
  text "PA0       PA1       PA2      PA3      PA4        PA5" at 44.958,4.325 h1
Bottom Overlay:
  text "RC522 Shield  / for / STM32F103UNO" at 61.211,21.59 h1
  text "BURAK KAAN" at 57.832,18.796 h0.8
  text "ŞAHİN" at 49.149,17.806 h1.5

## Text inside footprints (layer, text, board x,y; h text height)
SW1: Mechanical 13 "4" at 42.167,16.564 h1.27 r90; Mechanical 13 "3" at 42.166,8.429 h1.27 r90; Mechanical 13 "2" at 37.844,16.566 h1.27 r90; Mechanical 13 "1" at 37.718,8.684 h1.27 r90
SW2: Mechanical 13 "4" at 16.767,16.513 h1.27 r90; Mechanical 13 "3" at 16.766,8.378 h1.27 r90; Mechanical 13 "2" at 12.444,16.515 h1.27 r90; Mechanical 13 "1" at 12.318,8.633 h1.27 r90
SW3: Mechanical 13 "4" at 34.039,16.513 h1.27 r90; Mechanical 13 "3" at 34.038,8.378 h1.27 r90; Mechanical 13 "2" at 29.716,16.515 h1.27 r90; Mechanical 13 "1" at 29.59,8.633 h1.27 r90
SW4: Mechanical 13 "4" at 25.403,16.513 h1.27 r90; Mechanical 13 "3" at 25.402,8.378 h1.27 r90; Mechanical 13 "2" at 21.08,16.515 h1.27 r90; Mechanical 13 "1" at 20.954,8.633 h1.27 r90